# Altium PCB pcb_001.PcbDoc
Units mm, origin at the board's own origin, x right, y up, seen from the top; angles counter-clockwise.
Board outline 25 x 25 mm, 2 copper layers (Top Layer, Bottom Layer); 28 components, 21 nets, 91 pads, 51 vias.
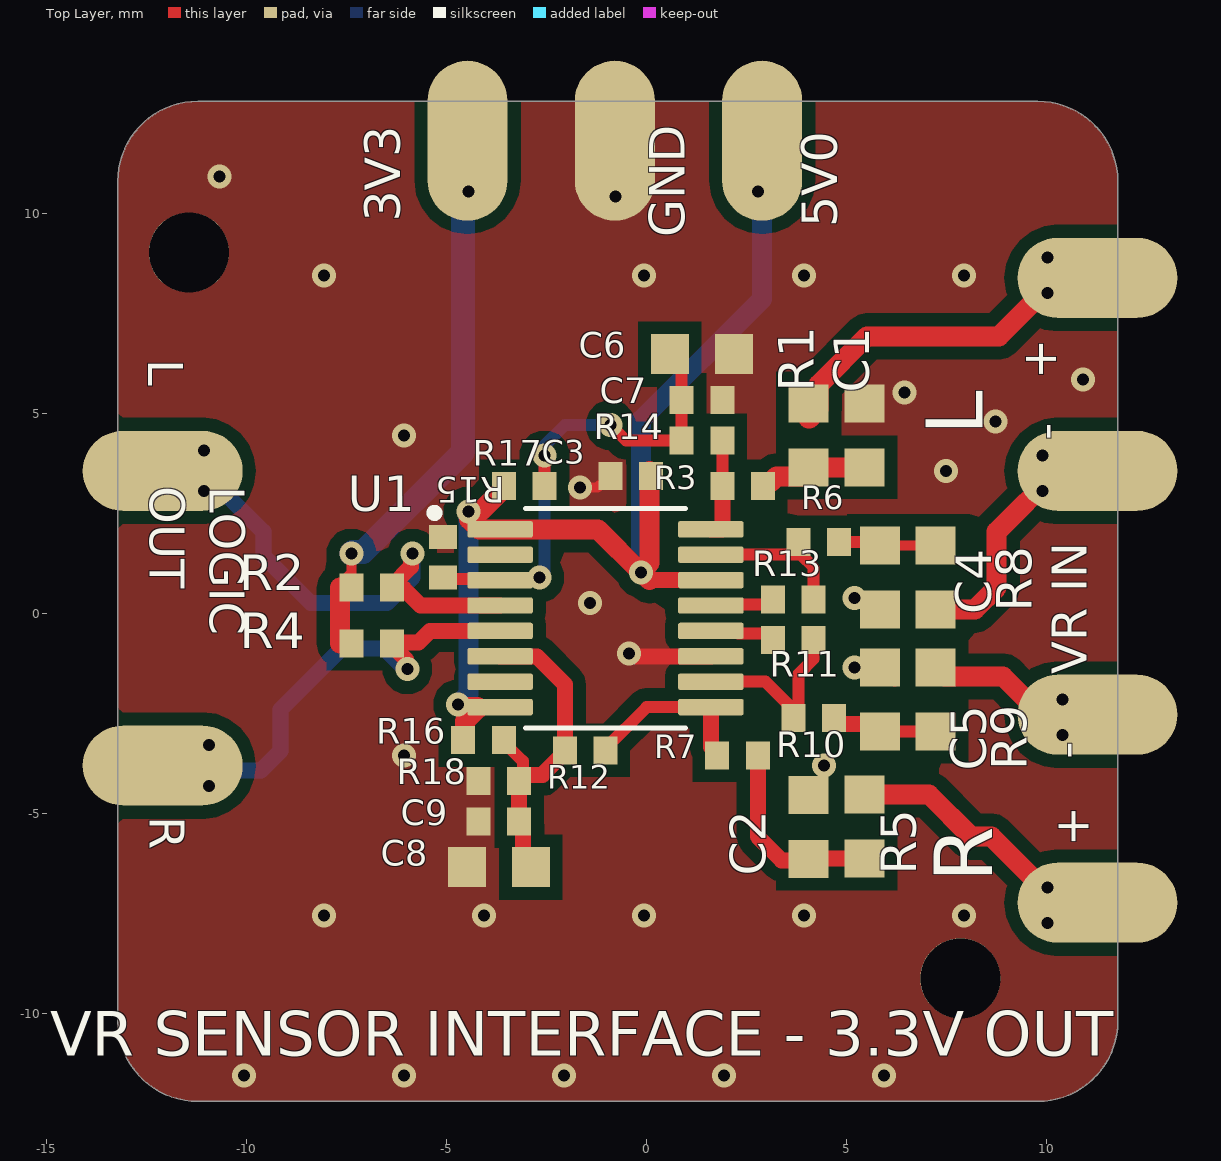
[diagram p0: Top Layer view]
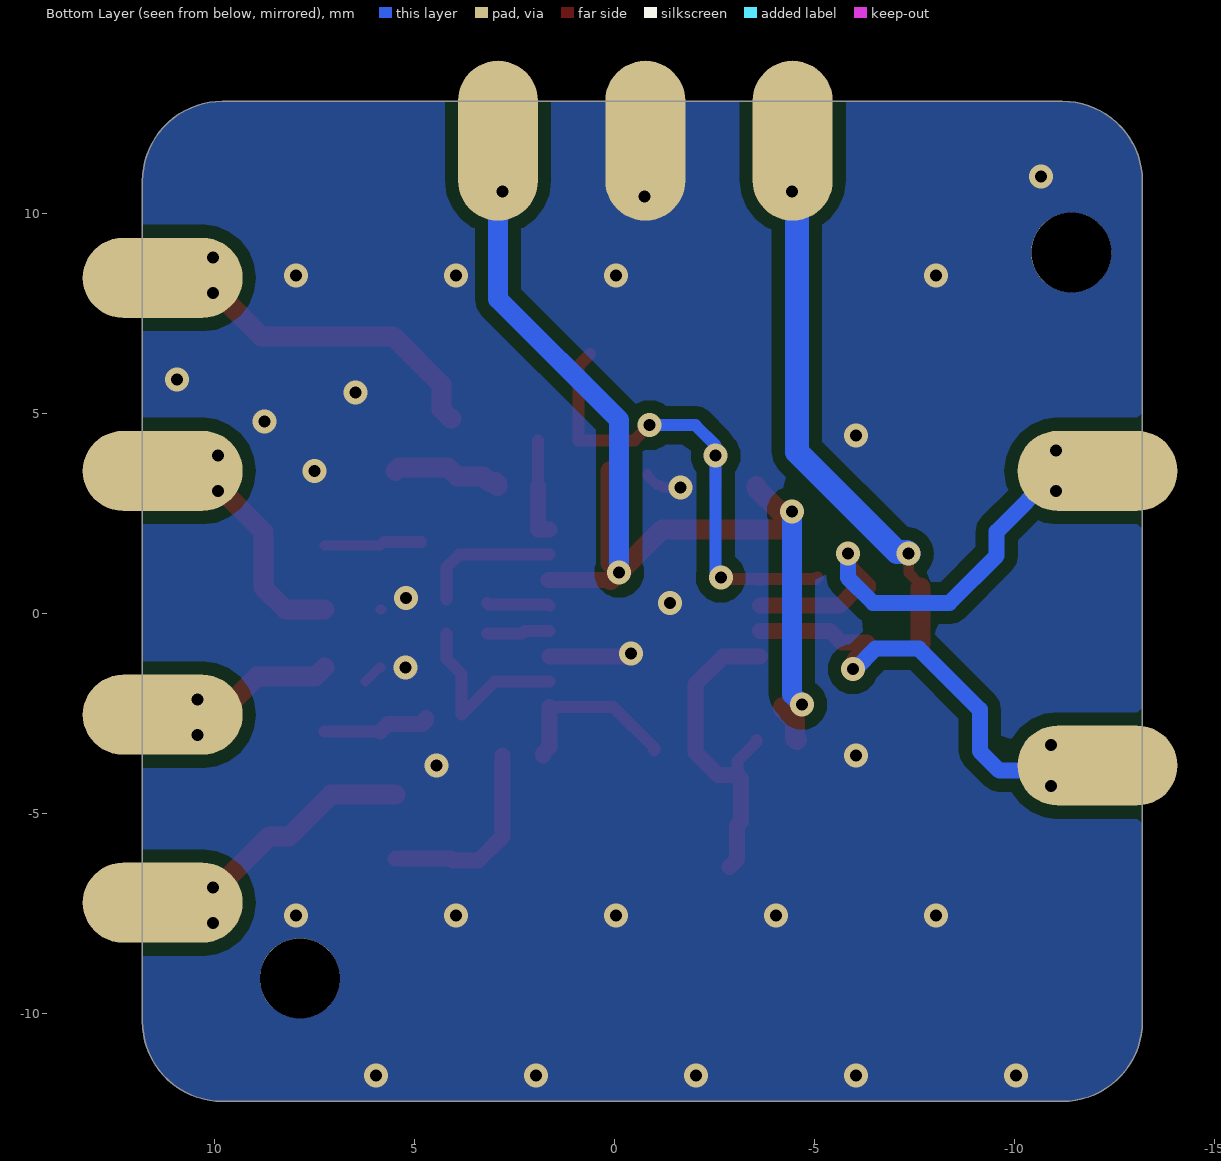
[diagram p1: Bottom Layer view, seen from below]

## Layer stack, top to bottom
Top Solder: solder mask 0.0102, Solder Resist, Dk 3.5
Top Layer: signal copper 0.0356
Dielectric 1: dielectric 0.32, FR-4, Dk 4.8
Bottom Layer: signal copper 0.0356
Bottom Solder: solder mask 0.0102, Solder Resist, Dk 3.5

## Board outline
-13.208,-10.205 -13.208,10.795 cw(c-11.208,10.795) -11.208,12.795 9.792,12.795 cw(c9.792,10.795) 11.792,10.795 11.792,-10.205 cw(c9.792,-10.205) 9.792,-12.205 -11.208,-12.205 cw(c-11.208,-10.205)

## Design rules (kind name [scope] priority, off if disabled: settings)
Clearance [Not InNet('GND')] p1 off: gap=0.1 ignorepadtopadclearanceinfootprint=FALSE
Clearance Clearance_1 [InNet('GND')] p2 off: gap=0.3 ignorepadtopadclearanceinfootprint=FALSE
ComponentClearance [All] p1: gap=0.1 collisioncheckmode=3 verticalgap=0.254 showdistances=FALSE
Creepage [All] p1: checkdistance=0.3 applytopolygonpour=TRUE
PlaneConnect [All] p1: planeconnectstyle=Direct reliefexpansion=0.508 reliefentries=4 reliefconductorwidth=0.254 reliefairgap=0.254
PolygonConnect [All] p1: connectstyle=Direct reliefconductorwidth=0.254 reliefentries=4 polygonreliefangle="90 Angle" airgapwidth=0.254
RoutingVias [All] p1: holewidth=0.711 width=1.27 viastyle="Through Hole" minholewidth=0.2 minwidth=0.4 maxholewidth=0.711 maxwidth=1.27
SolderMaskExpansion [All] p1: expansion=0 istentingtop=FALSE
SupplyNets "Schematic Supply Nets" [InNet('GND')] p1: voltage=0.000
Width [All] p1: maxlimit=5 minlimit=0.254 preferedwidth=0.254
28 further rules are at their usual default settings.

## Components (designator, comment, footprint, x,y, rotation, side; value= is the part's Value field where it differs from the comment)
C1 "Capacitor_0603" 0603_FP 5.461,4.445 r90 top value="47 nF"
C2 "Capacitor_0603" 0603_FP 4.064,-5.345 r90 top value="47 nF"
C3 "Capacitor_0402" 0402_fp -0.381,3.429 r180 top value="100 nF"
C4 "Capacitor_0603" 0603_FP 5.842,0.889 r270 top value="47 nF"
C5 "Capacitor_0603" 0603_FP 5.842,-2.159 r90 top value="47 nF"
C6 "Capacitor_0603" 0603_FP 1.397,6.477 r0 top value="10 uF"
C7 "Capacitor_0402" 0402_fp 1.397,5.334 r0 top value="100 nF"
C8 "Capacitor_0603" 0603_FP -3.683,-6.35 r180 top value="10 uF"
C9 "Capacitor_0402" 0402_fp -3.683,-5.207 r180 top value="100 nF"
R1 "Resistor_0603" 0603_FP 4.064,4.445 r90 top value="10 kΩ"
R2 "Resistor_0402" 0402_fp -6.858,0.635 r0 top value="12 kΩ"
R3 "Resistor_0402" 0402_fp 2.413,3.175 r180 top value="12 kΩ"
R4 "Resistor_0402" 0402_fp -6.858,-0.762 r0 top value="12 kΩ"
R5 "Resistor_0603" 0603_FP 5.461,-5.334 r90 top value="10 kΩ"
R6 "Resistor_0402" 0402_fp 4.318,1.778 r180 top value="12 kΩ"
R7 "Resistor_0402" 0402_fp 2.286,-3.556 r180 top value="12 kΩ"
R8 "Resistor_0603" 0603_FP 7.239,0.889 r270 top value="10 kΩ"
R9 "Resistor_0603" 0603_FP 7.239,-2.159 r90 top value="10 kΩ"
R10 "Resistor_0402" 0402_fp 4.191,-2.623 r180 top value="12 kΩ"
R11 "Resistor_0402" 0402_fp 3.68,-0.677 r0 top value="12 kΩ"
R12 "Resistor_0402" 0402_fp -1.524,-3.429 r0 top value="12 kΩ"
R13 "Resistor_0402" 0402_fp 3.68,0.339 r0 top value="12 kΩ"
R14 "Resistor_0402" 0402_fp 1.397,4.318 r0 top value="12 kΩ"
R15 "Resistor_0402" 0402_fp -3.048,3.175 r180 top value="1 kΩ"
R16 "Resistor_0402" 0402_fp -4.064,-3.175 r180 top value="1 kΩ"
R17 "Resistor_0402" 0402_fp -5.08,1.397 r90 top value="1 kΩ"
R18 "Resistor_0402" 0402_fp -3.683,-4.191 r180 top value="1 kΩ"
U1 "MAX9927AEE+" SOP63P602X175-16N -1.016,-0.127 r0 top

## Footprints (in the part's own frame and the unit in brackets; to place one, negate y for a bottom-side part, rotate by r counter-clockwise, add the part's x,y. Pads: shape width x height; smd on the part's side, far side on the other; paste and mask are expansions set on the pad)
0402_fp [mm]
  rect 0.6x0.7 smd mask+0.05: 1(-0.508,0) 2(0.508,0)
0603_FP [mm]
  rect 0.95x1 smd mask+0.05: 1(-0.8,0) 2(0.8,0)
SOP63P602X175-16N [mm]
  rrect25% 1.64x0.41 smd paste+0 mask+0.102: 1(-2.635,2.222) 2(-2.635,1.587) 3(-2.635,0.953) 4(-2.635,0.318) 5(-2.635,-0.318) 6(-2.635,-0.953) 7(-2.635,-1.587) 8(-2.635,-2.222) 9(2.635,-2.222) 10(2.635,-1.587) 11(2.635,-0.953) 12(2.635,-0.318) 13(2.635,0.318) 14(2.635,0.953) 15(2.635,1.587) 16(2.635,2.222)
  silkscreen extent -4.37,-2.75 1.99,2.75, body extent -3,-2.45 3,2.45, height 1.75

## Part data
C1 C2 C3 C4 C5 C6 C7 C8 C9 R1 R2 R3 R4 R5 R6 R7 R8 R9 R10 R11 R12 R13 R14 R15 R16 R17 R18: Package=0402, Format=0402
U1: "Variable-Reluctance Sensor Interface with Differential Input and Adaptive Peak Threshold", Package="QSOP-16 Maxim", Check_prices=https://www.snapeda.com/parts/MAX9927AEE+/Analog+Devices/view-part/?ref=eda, MF="Analog Devices", MP=MAX9927AEE+, SnapEDA_Link=https://www.snapeda.com/parts/MAX9927AEE+/Analog+Devices/view-part/?ref=snap

## Free pads (board coordinates)
  oval 4x2 smd: 8(-12.084,-3.81) 8(-12.084,3.556) 8(11.284,-7.239) 8(11.284,-2.54) 8(11.284,3.556) 8(11.284,8.382)
  oval 4x2 smd far side: 8(-12.084,-3.81) 8(-12.084,3.556) 8(11.284,-7.239) 8(11.284,-2.54) 8(11.284,3.556) 8(11.284,8.382)
  oval 2x4 smd: 8(-4.464,11.81) 8(-0.781,11.81) 8(2.902,11.81)
  oval 2x4 smd far side: 8(-4.464,11.81) 8(-0.781,11.81) 8(2.902,11.81)
  round 0 smd far side: 9(9.906,3.556)
  round 2 hole 2: 10(-11.43,9.017) 10(7.855,-9.13)

## Via types
v1: diameter 0.6, hole 0.3, Top Layer to Bottom Layer, 51 vias

## Nets (pads, with @x,y where several pads share a name; then routed paths per layer and width w, separated by ;. In a path a pad name is that pad's centre, name@x,y a point inside that pad or via, vN(x,y) a via of type N, cw(c..) or ccw(c..) an arc to the next point about the centre after c; other vN are vias at no path point)
3V3: pad.8@-4.464,11.81 R2.1 R4.1 | length 12.1
  Top Layer w0.254: R2.1@-7.658,0.635 -7.658,0.716 -7.366,1.008 v1(-7.366,1.486)
  Top Layer w0.5: R4.1@-7.658,-0.762 R2.1@-7.658,0.635
  Bottom Layer w0.6: v1(-7.366,1.486) -7.328,1.524 -7.075,1.524 -4.572,4.027 pad.8@-4.572,9.906
  other v1: -4.445,10.541
5V0: C3.1 pad.8@2.902,11.81 R15.2 R16.2 U1.1 U1.8 U1.14 | length 29.1
  Top Layer w0.4: v1@0.091,0.826 U1.14@1.639,0.826
  Top Layer w0.5: v1(-4.699,-2.286) -4.672,-2.286 -4.608,-2.349 U1.8@-4.221,-2.349 ; R16.2 -4.522,-3.125 -4.522,-2.695 U1.8@-4.221,-2.394 ; R15.2 -3.556,3.125 -4.122,2.559 -4.426,2.559 v1(-4.445,2.54) -4.426,2.521 -4.426,2.345 -4.176,2.095 U1.1 -1.206,2.095 v1(-0.127,1.016) ; C3.1@0.089,3.556 0.089,1.259 -0.127,1.043 v1(-0.127,1.016) ; v1@0.091,0.826 -0.1,1.016 v1(-0.127,1.016)
  Bottom Layer w0.5: v1(-4.699,-2.286) -4.445,-2.032 v1(-4.445,2.54) ; v1(-0.127,1.016) -0.127,4.826 2.902,7.855 pad.8@2.902,11.81
  other v1: 2.794,10.541
BIAS1: C6.1 C7.1 R14.1 R15.1 R17.1 U1.3 | length 12.6
  Top Layer w0.3: R17.1 -5.048,0.857 -3.683,0.857 U1.3 -3.619,0.857 -2.699,0.857 v1(-2.667,0.889) ; R15.1 v1(-2.54,3.937) ; v1(-0.889,4.699) -0.508,4.318 R14.1 C7.1@0.889,5.296 ; C6.1 0.889,6.185 C7.1
  Bottom Layer w0.3: v1(-2.667,0.889) -2.54,1.016 v1(-2.54,3.937) -2.54,4.191 -2.032,4.699 v1(-0.889,4.699)
BIAS2: C8.1 C9.1 R12.1 R16.1 R18.1 U1.6 | length 8.3
  Top Layer w0.3: R16.1 -3.556,-3.225 -3.081,-3.7 R18.1@-3.081,-3.968
  Top Layer w0.4: U1.6 -3.646,-1.085 -2.725,-1.085 -2.032,-1.778 R12.1@-2.032,-3.442 ; R18.1 C9.1 -3.075,-5.307 -3.075,-6.158 C8.1 ; R18.1@-3.175,-4.141 -3.075,-4.041 -2.594,-4.041 -2.032,-3.479 R12.1
GND: C1.2 C2.2 C3.2 C4.2 C5.2 C6.2 C7.2 C8.2 C9.2 pad.8@-0.781,11.81 pad.10 R17.2 R18.2 U1.11 | length 3.6
  Top Layer w0.254: v1(-1.658,3.137) -1.65,3.145 -1.211,3.145 -1.15,3.206 -1.062,3.206 -0.838,3.43 C3.2@-0.838,3.476 ; C4.2@5.817,0.089 C4.2 ; C5.2 5.867,-1.359 C5.2@6.215,-1.707
  Top Layer w0.4: v1(-0.426,-1.013) -0.372,-1.013 -0.305,-1.079 U1.11
  other v1: -10.051,-11.563 -6.051,-11.563 -2.051,-11.563 1.949,-11.563 5.949,-11.563 -8.051,-7.563 -4.051,-7.563 -0.051,-7.563 3.949,-7.563 7.949,-7.563 4.445,-3.81 -6.051,-3.563 5.212,-1.363 -1.397,0.254 5.207,0.381 7.493,3.556 -6.051,4.437 8.739,4.791 6.465,5.515 10.922,5.842 -8.051,8.437 -0.051,8.437 3.949,8.437 7.949,8.437 -0.762,10.414 -10.668,10.922
IN1+: R3.2 R14.2 U1.16 | length 2.5
  Top Layer w0.3: R3.2 R14.2
  Top Layer w0.4: U1.16 1.9,2.095 1.905,2.101 R3.2
IN1-: R6.2 R13.2 U1.15 | length 3.5
  Top Layer w0.3: U1.15 3.873,1.46 4.191,1.143 4.191,0.342 R13.2
IN2+: R7.2 R12.2 U1.9 | length 4.4
  Top Layer w0.3: R12.2 -1.016,-3.379 0.013,-2.349 U1.9
  Top Layer w0.4: U1.9 1.619,-3.347 1.778,-3.506 R7.2
IN2-: R10.2 R11.2 U1.10 | length 4.7
  Top Layer w0.3: U1.10 2.984,-1.714 3.81,-2.54 3.81,-1.524 4.191,-1.143 R11.2@4.191,-0.508
LEFT_PULSE_3V3: pad.8@-12.084,3.556 R2.2 U1.4 | length 12
  Top Layer w0.4: R2.2 -6.35,0.685 -5.88,1.155 -5.88,1.448 v1(-5.842,1.486) ; R2.2@-6.058,0.61 -5.639,0.191 U1.4
  Bottom Layer w0.254: pad.8@-12.573,3.556 pad.8@-12.084,3.556
  Bottom Layer w0.4: pad.8@-11.084,3.556 -9.566,2.038 -9.566,1.438 -8.382,0.254 -6.477,0.254 -5.842,0.889 v1(-5.842,1.486)
  other v1: -11.049,3.048 -11.049,4.064
LEFT_PULSE_N: pad.8@11.284,3.556 R8.2 | length 6.3
  Top Layer w0.5: R8.2 8.217,0.089 8.763,0.635 8.763,2.035 10.284,3.556 pad.8@11.284,3.556
  other v1: 9.906,3.048 9.906,3.937
LEFT_PULSE_P: pad.8@11.284,8.382 R1.2 | length 9
  Top Layer w0.5: R1.2@4.064,4.864 4.089,4.864 4.314,5.089 4.314,5.711 5.525,6.922 8.824,6.922 10.284,8.382 pad.8@11.284,8.382
  other v1: 10.033,8.001 10.033,8.89
OUT1: R13.1 U1.13 | length 1.6
  Top Layer w0.3: U1.13 1.651,0.222 3.143,0.222 R13.1@3.175,0.254
OUT2: R11.1 U1.12 | length 1.6
  Top Layer w0.3: U1.12 2.234,-0.445 2.298,-0.508 R11.1@3.175,-0.508
RIGHT_PULSE_3V3: pad.8@-12.084,-3.81 R4.2 U1.5 | length 12.2
  Top Layer w0.254: -5.969,-0.762 -5.945,-0.738 -5.691,-0.738
  Top Layer w0.4: v1(-5.969,-1.397) -6.007,-1.359 -6.007,-1.155 -6.35,-0.812 R4.2 -6.326,-0.738 -5.691,-0.738 -5.397,-0.445 U1.5
  Bottom Layer w0.4: pad.8@-12.084,-3.81 -11.957,-3.937 -9.63,-3.937 -9.144,-3.451 -9.144,-2.413 -7.62,-0.889 -6.531,-0.889 -6.023,-1.397 v1(-5.969,-1.397)
  other v1: -10.922,-4.318 -10.922,-3.302
RIGHT_PULSE_N: pad.8@11.284,-2.54 R9.2 | length 4.7
  Top Layer w0.5: R9.2 7.464,-1.584 8.922,-1.584 9.647,-2.309 pad.8@10.414,-2.309 ; v1(10.414,-2.159) 11.03,-2.159 pad.8@11.411,-2.54
  other v1: 10.414,-3.048
RIGHT_PULSE_P: pad.8@11.284,-7.239 R5.2 | length 6.9
  Top Layer w0.5: R5.2 7.074,-4.534 8.128,-5.588 8.633,-5.588 10.284,-7.239 pad.8@11.284,-7.239
  other v1: 10.033,-7.747 10.033,-6.858
VR_SENSOR_IN1+: C1.1 R1.1 R3.1 | length 2.8
  Top Layer w0.5: R3.1 2.921,3.225 2.971,3.275 3.119,3.275 3.264,3.42 3.928,3.42 4.153,3.645 5.372,3.645 C1.1@5.461,3.556
VR_SENSOR_IN1-: C4.1 R6.1 R8.1 | length 2.4
  Top Layer w0.254: C4.1@5.753,1.778 C4.1 R8.1
  Top Layer w0.3: R6.1 C4.1@5.753,1.778
VR_SENSOR_IN2+: C2.1 R5.1 R7.1 | length 5
  Top Layer w0.4: R7.1 2.794,-5.588 3.39,-6.184 4.025,-6.184 4.069,-6.139 5.456,-6.139 R5.1
VR_SENSOR_IN2-: C5.1 R9.1 R10.1 | length 2.7
  Top Layer w0.3: C5.1 R9.1
  Top Layer w0.4: R10.1 4.699,-2.673 4.799,-2.773 5.656,-2.773 C5.1
pads on no net: U1.2 U1.7

## Polygon pours and split planes (outlines as drawn)
GND on Top Layer "GND_L01_P001" (solid, pour order 1): -13.208,-10.205 -13.208,10.795 cw(c-11.208,10.795) -11.208,12.795 9.792,12.795 cw(c9.792,10.795) 11.792,10.795 11.792,-10.205 cw(c9.792,-10.205) 9.792,-12.205 -11.208,-12.205 cw(c-11.208,-10.205)
GND on Bottom Layer "GND_L02_P000" (solid, pour order 0): -13.208,-10.205 -13.208,10.795 cw(c-11.208,10.795) -11.208,12.795 9.792,12.795 cw(c9.792,10.795) 11.792,10.795 11.792,-10.205 cw(c9.792,-10.205) 9.792,-12.205 -11.208,-12.205 cw(c-11.208,-10.205)

## Silkscreen, mask and mechanical layers (free items; w line width, h text height)
Top Overlay:
  text "3V3" at -5.842,9.779 h1.52 r90
  text "5V0" at 5.08,9.652 h1.52 r90
  text "GND" at 1.27,9.398 h1.52 r90
  text "L" at -12.735,6.342 h1.5 r270
  text "+" at 10.541,5.842 h1.5 r90
  text "L" at 8.89,4.445 h2.5 r90
  text "-" at 10.668,4.318 h1.5 r90
  text "LOGIC / OUT" at -12.7,3.167 h1.5 r270
  text "VR IN" at 11.303,-1.524 h1.5 r90
  text "-" at 10.008,-3.214 h1.5 r270
  text "+" at 10.033,-4.826 h1.5 r270
  text "R" at -12.7,-5.08 h1.5 r270
  text "R" at 9.144,-6.731 h2.5 r90
  text "VR SENSOR INTERFACE - 3.3V OUT" at -14.9,-11.43 h1.9